# Altium PCB Control_Board_Model_C_Basic_Component_Placement.PcbDoc (part 6 of 8)
Units mil, origin at the board's own origin, x right, y up, seen from the top; angles counter-clockwise.
Board outline 3417.32 x 2110.24 mil, 6 copper layers (1-SIG-TOP, 2-GND, 3-PWR, 4-SIG-HOR, 5-SIG-VERT, 6-GND-BOT), stack 46.063 mil thick; 420 components, 340 nets, 1596 pads, 39 vias.
Unrouted connection lines stored in the file: 362.
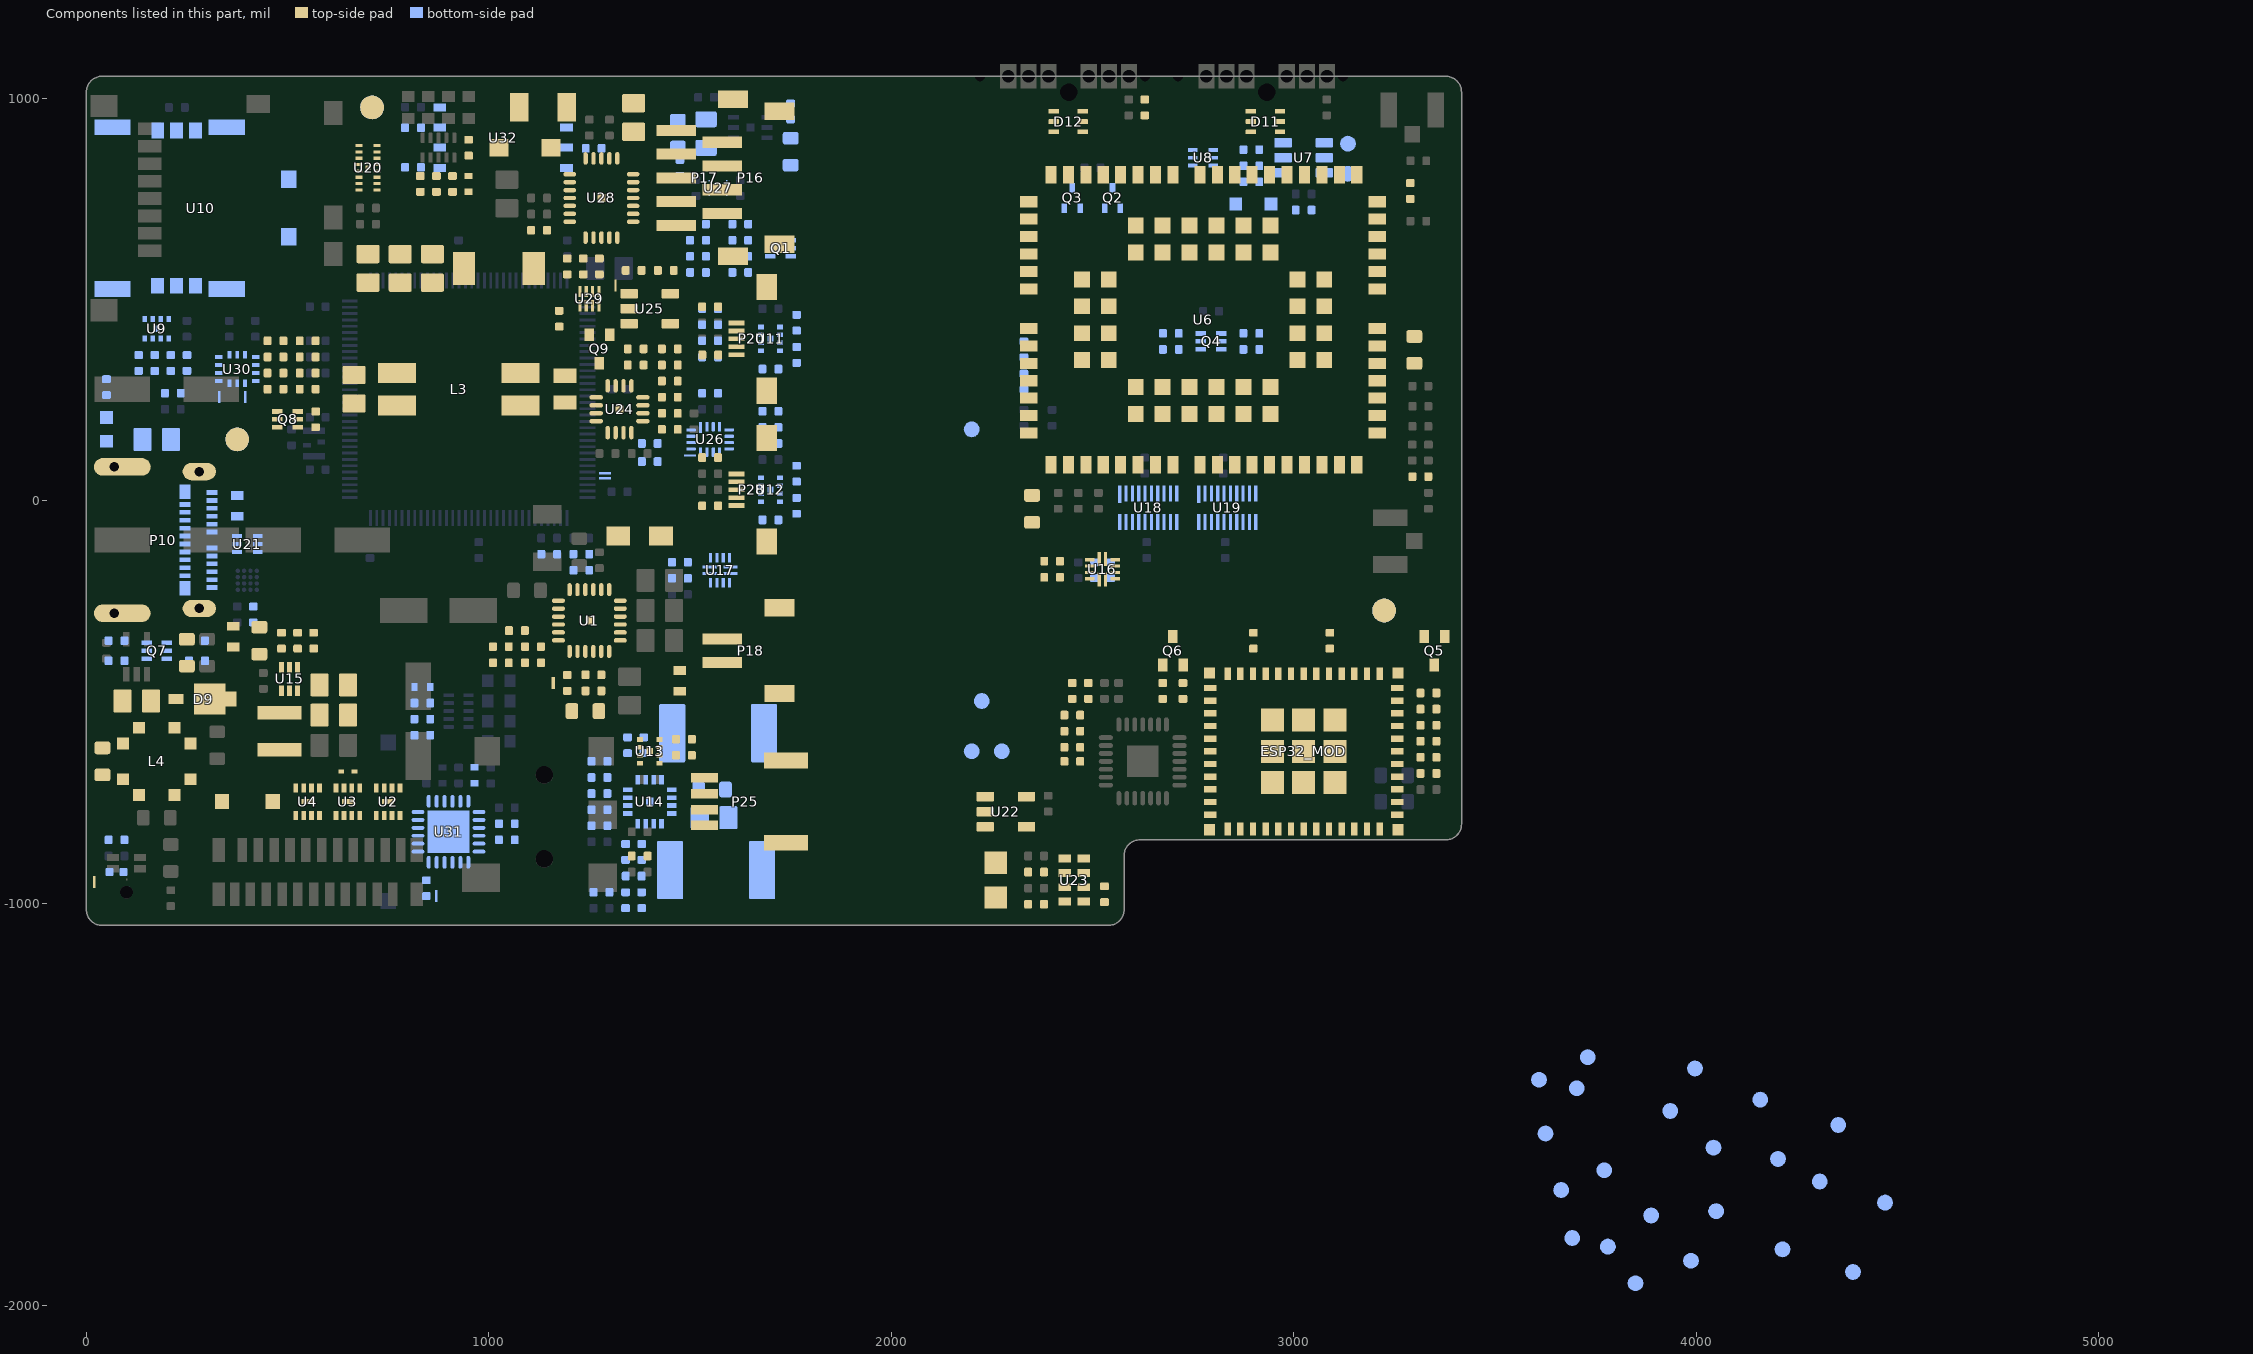
[diagram p7: the components of this part, seen from the top]

## Part data (continued)
R79: "536 kOhms ±1% 0.063W, 1/16W Chip Resistor 0402 (1005 Metric) Moisture Resistant Thick Film", Case/Package=0402, Case Code (Metric)=1005, Manufacturer=Yageo, Manufacturer Part Number=RC0402FR-07536KL, Max Operating Temperature=155°C, Max Power Dissipation=63mW, Min Operating Temperature=-55°C, Power Rating=62.5mW, Resistance=536kR, Supplier Part Number 1=YAG3181CT-ND, Temperature Coefficient=100ppm/°C, Tolerance=1%, Voltage Rating=50V, Case Code (Imperial)=0402, ComponentLink1Description=http://www.yageo.com/documents/recent/PYu-RC0402_51_RoHS_L_6.pdf?src-supplier=Avnet+Europe, ComponentLink1URL=http://www.yageo.com/documents/recent/PYu-RC0402_51_RoHS_L_6.pdf?src-supplier=Avnet+Europe, ComponentLink2Description=http://www.mouser.com/ds/2/447/PYu-RC0402_51_RoHS_L_6_r-8721.pdf?src-supplier=Mouser, ComponentLink2URL=http://www.mouser.com/ds/2/447/PYu-RC0402_51_RoHS_L_6_r-8721.pdf?src-supplier=Mouser, ComponentLink3Description=http://www.yageo.com/documents/recent/PYu-RC0402_51_RoHS_L_6_r.pdf?src-supplier=Future+Electronics, ComponentLink3URL=http://www.yageo.com/documents/recent/PYu-RC0402_51_RoHS_L_6_r.pdf?src-supplier=Future+Electronics, ComponentLink4Description=http://www.yageo.com/documents/recent/PYu-RC0402_51_RoHS_L_6.pdf?src-supplier=Avnet, ComponentLink4URL=http://www.yageo.com/documents/recent/PYu-RC0402_51_RoHS_L_6.pdf?src-supplier=Avnet, Composition="Thick Film", Contact Plating=Tin,Matte, Depth=0.5mm, Features="Moisture Resistant", Height=0.016inch, Lead Free="Lead Free", Length=1mm, Military Standard=Not, Mount="Surface Mount", Number of Terminations=2, Packaging="Tape and Reel", Pricing 1="1=0.1, 10=0.015, 100=0.0062, 1000=0.0028, 2500=0.0024, 5000=0.002 (USD)", Stock 1=16630, Supplier 1=Digi-Key, Termination=SMD/SMT, Width=0.02inch
R89 R90 R126 R134: "390 kOhms ±1% 0.063W, 1/16W Chip Resistor 0402 (1005 Metric) Moisture Resistant Thick Film", Case/Package=0402, Case Code (Metric)=1005, Manufacturer=Yageo, Manufacturer Part Number=RC0402FR-07390KL, Max Operating Temperature=155°C, Max Power Dissipation=63mW, Min Operating Temperature=-55°C, Power Rating=62.5mW, Resistance=390kR, Supplier Part Number 1=YAG3143CT-ND, Temperature Coefficient=100ppm/°C, Tolerance=1%, Voltage Rating=50V, Case Code (Imperial)=0402, ComponentLink1Description=http://www.yageo.com/documents/recent/PYu-RC0402_51_RoHS_L_6.pdf?src-supplier=Future+Electronics, ComponentLink1URL=http://www.yageo.com/documents/recent/PYu-RC0402_51_RoHS_L_6.pdf?src-supplier=Future+Electronics, ComponentLink2Description=http://www.farnell.com/datasheets/2167052.pdf?src-supplier=Element14, ComponentLink2URL=http://www.farnell.com/datasheets/2167052.pdf?src-supplier=Element14, ComponentLink3Description=http://www.mouser.com/ds/2/447/PYu-RC0402_51_RoHS_L_6_r-8721.pdf?src-supplier=Mouser, ComponentLink3URL=http://www.mouser.com/ds/2/447/PYu-RC0402_51_RoHS_L_6_r-8721.pdf?src-supplier=Mouser, Composition="Thick Film", Depth=0.5mm, Features="Moisture Resistant", Height=0.016inch, Lead Free="Lead Free", Length=1mm, Military Standard=Not, Number of Terminations=2, Packaging="Tape and Reel", Pricing 1="1=0.1, 10=0.016, 100=0.0064, 1000=0.0029, 2500=0.0025, 5000=0.0021 (USD)", REACH SVHC=Unknown, Stock 1=118017, Supplier 1=Digi-Key, Termination=SMD/SMT, Weight=2.3E-05oz, Width=0.02inch
  R89 R90: ClassName=STM32G473CETx, Mount="Surface Mount"
R92 R93 R96: "75 kOhms ±1% 0.063W, 1/16W Chip Resistor 0402 (1005 Metric) Automotive AEC-Q200 Thick Film", Case/Package=0402, Case Code (Metric)=1005, Manufacturer="Stackpole Electronics", Manufacturer Part Number=RMCF0402FT75K0, Max Operating Temperature=155°C, Max Power Dissipation=63mW, Min Operating Temperature=-55°C, Resistance=75kR, Supplier Part Number 1=RMCF0402FT75K0CT-ND, Temperature Coefficient=100ppm/°C, Tolerance=1%, Case Code (Imperial)=0402, ClassName=STM32G473CETx, ComponentLink1Description=https://www.seielect.com/catalog/SEI-Packaging.pdf?src-supplier=Digi-Key, ComponentLink1URL=https://www.seielect.com/catalog/SEI-Packaging.pdf?src-supplier=Digi-Key, ComponentLink2Description=http://www.seielect.com/Catalog/Sei-RMC.pdf?src-supplier=Future+Electronics, ComponentLink2URL=http://www.seielect.com/Catalog/Sei-RMC.pdf?src-supplier=Future+Electronics, ComponentLink3Description=https://www.seielect.com/catalog/SEI-RMCF_RMCP.pdf?src-supplier=Avnet, ComponentLink3URL=https://www.seielect.com/catalog/SEI-RMCF_RMCP.pdf?src-supplier=Avnet, ComponentLink4Description=http://components.arrow.com/part/dataview/47811039S7743759N1174?src-supplier=Arrow, ComponentLink4URL=http://components.arrow.com/part/dataview/47811039S7743759N1174?src-supplier=Arrow, ComponentLink5Description=https://www.verical.com/server-webapp/html/getDatasheet?partID=492569&src-supplier=Verical, ComponentLink5URL=https://www.verical.com/server-webapp/html/getDatasheet?partID=492569&src-supplier=Verical, Composition="Thick Film", Contact Plating=Tin,Matte, Depth=0.5mm, Features="Automotive AEC-Q200", Height=0.016inch, Lead Free="Lead Free", Length=0.039inch, Military Standard=Not, Mount="Surface Mount", Number of Terminations=2, Packaging="Tape and Reel", Power Rating=63mW, Pricing 1="1=0.1, 10=0.014, 100=0.0058, 1000=0.0026, 2500=0.0023, 5000=0.0019 (USD)", Radiation Hardening=No, Stock 1=24693, Supplier 1=Digi-Key, Width=0.02inch
R95: "27 kOhms ±1% 0.063W, 1/16W Chip Resistor 0402 (1005 Metric) Moisture Resistant Thick Film", Case/Package=0402, Case Code (Metric)=1005, Manufacturer=Yageo, Manufacturer Part Number=RC0402FR-0727KL, Max Operating Temperature=155°C, Max Power Dissipation=63mW, Min Operating Temperature=-55°C, Package Quantity=10000, Resistance=27kR, Supplier Part Number 1=311-27.0KLRCT-ND, Temperature Coefficient=100ppm/°C, Tolerance=1%, Voltage Rating=50V, Case Code (Imperial)=0402, ClassName=STM32G473CETx, ComponentLink1Description=http://www.farnell.com/datasheets/2167052.pdf?src-supplier=Element14, ComponentLink1URL=http://www.farnell.com/datasheets/2167052.pdf?src-supplier=Element14, ComponentLink2Description=http://documents.rs-components.com/techlib://itc_doclist_GB.htm?stockno=6186475&src-supplier=RSComponents, ComponentLink2URL=http://documents.rs-components.com/techlib://itc_doclist_GB.htm?stockno=6186475&src-supplier=RSComponents, ComponentLink3Description=http://www.yageo.com/documents/recent/PYu-RC_Group_51_RoHS_L_10.pdf?src-supplier=Digi-Key, ComponentLink3URL=http://www.yageo.com/documents/recent/PYu-RC_Group_51_RoHS_L_10.pdf?src-supplier=Digi-Key, ComponentLink4Description=http://www.yageo.com/documents/recent/PYu-RC0402_51_RoHS_L_6_r.pdf?src-supplier=Future+Electronics, ComponentLink4URL=http://www.yageo.com/documents/recent/PYu-RC0402_51_RoHS_L_6_r.pdf?src-supplier=Future+Electronics, Composition="Thick Film", Depth=0.5mm, Features="Moisture Resistant", Height=0.016inch, Lead Free="Lead Free", Length=1mm, Military Standard=Not, Mount="Surface Mount", Number of Terminations=2, Packaging="Tape and Reel", Power Rating=63mW, Pricing 1="1=0.1, 10=0.016, 100=0.0064, 1000=0.0029, 2500=0.0025, 5000=0.0021 (USD)", REACH SVHC=Unknown, Stock 1=1508379, Supplier 1=Digi-Key, Termination=SMD/SMT, Width=0.02inch
R98: "402 Ohms ±1% 0.063W, 1/16W Chip Resistor 0402 (1005 Metric) Moisture Resistant Thick Film", Case/Package=0402, Case Code (Metric)=1005, Manufacturer=Yageo, Manufacturer Part Number=RC0402FR-07402RL, Max Operating Temperature=155°C, Max Power Dissipation=63mW, Min Operating Temperature=-55°C, Power Rating=62.5mW, Resistance=402R, Supplier Part Number 1=YAG3152CT-ND, Temperature Coefficient=100ppm/°C, Tolerance=1%, Voltage Rating=50V, Case Code (Imperial)=0402, ComponentLink1Description=http://www.yageo.com/documents/recent/PYu-RC0402_51_RoHS_L_6.pdf?src-supplier=Avnet, ComponentLink1URL=http://www.yageo.com/documents/recent/PYu-RC0402_51_RoHS_L_6.pdf?src-supplier=Avnet, ComponentLink2Description=http://www.yageo.com/documents/recent/PYu-RC0402_51_RoHS_L_6.pdf?src-supplier=Avnet+Europe, ComponentLink2URL=http://www.yageo.com/documents/recent/PYu-RC0402_51_RoHS_L_6.pdf?src-supplier=Avnet+Europe, ComponentLink3Description=http://www.mouser.com/ds/2/447/PYu-RC0402_51_RoHS_L_6_r-8721.pdf?src-supplier=Mouser, ComponentLink3URL=http://www.mouser.com/ds/2/447/PYu-RC0402_51_RoHS_L_6_r-8721.pdf?src-supplier=Mouser, Composition="Thick Film", Contact Plating=Tin,Matte, Depth=0.5mm, Features="Moisture Resistant", Height=0.016inch, Lead Free="Lead Free", Length=0.039inch, Military Standard=Not, Mount="Surface Mount", Number of Terminations=2, Packaging="Tape and Reel", Pricing 1="1=0.1, 10=0.016, 100=0.0064, 1000=0.0029, 2500=0.0025, 5000=0.0021 (USD)", Stock 1=0, Supplier 1=Digi-Key, Termination=SMD/SMT, Width=0.02inch
R100: "54.9 kOhms ±1% 0.063W, 1/16W Chip Resistor 0402 (1005 Metric) Moisture Resistant Thick Film", Case/Package=0402, Case Code (Metric)=1005, Manufacturer=Yageo, Manufacturer Part Number=RC0402FR-0754K9L, Max Operating Temperature=155°C, Max Power Dissipation=63mW, Min Operating Temperature=-55°C, Power Rating=62.5mW, Resistance=54.9kR, Supplier Part Number 1=YAG3185CT-ND, Temperature Coefficient=100ppm/°C, Tolerance=1%, Voltage Rating=50V, Case Code (Imperial)=0402, ComponentLink1Description=http://www.yageo.com/documents/recent/PYu-RC0402_51_RoHS_L_6.pdf?src-supplier=Avnet+Europe, ComponentLink1URL=http://www.yageo.com/documents/recent/PYu-RC0402_51_RoHS_L_6.pdf?src-supplier=Avnet+Europe, ComponentLink2Description=http://www.yageo.com/documents/recent/PYu-RC0402_51_RoHS_L_6_r.pdf?src-supplier=Future+Electronics, ComponentLink2URL=http://www.yageo.com/documents/recent/PYu-RC0402_51_RoHS_L_6_r.pdf?src-supplier=Future+Electronics, ComponentLink3Description=http://www.yageo.com/documents/recent/PYu-RC0402_51_RoHS_L_6_r.pdf?src-supplier=Mouser, ComponentLink3URL=http://www.yageo.com/documents/recent/PYu-RC0402_51_RoHS_L_6_r.pdf?src-supplier=Mouser, Composition="Thick Film", Contact Plating=Tin,Matte, Depth=0.5mm, Features="Moisture Resistant", Height=0.016inch, Lead Free="Lead Free", Length=1mm, Military Standard=Not, Mount="Surface Mount", Number of Terminations=2, Packaging="Tape and Reel", Pricing 1="1=0.1, 10=0.015, 100=0.0062, 1000=0.0028, 2500=0.0024, 5000=0.002 (USD)", Stock 1=707322, Supplier 1=Digi-Key, Termination=SMD/SMT, Voltage Rating (DC)=50V, Width=0.02inch
R101: "1.2 kOhms ±1% 0.063W, 1/16W Chip Resistor 0402 (1005 Metric) Moisture Resistant Thick Film", Case/Package=0402, Case Code (Metric)=1005, Manufacturer=Yageo, Manufacturer Part Number=RC0402FR-071K2L, Max Operating Temperature=155°C, Max Power Dissipation=63mW, Min Operating Temperature=-55°C, Package Quantity=1, Resistance=1.2kR, Supplier Part Number 1=311-1.20KLRCT-ND, Temperature Coefficient=100ppm/°C, Tolerance=1%, Voltage Rating=50V, Case Code (Imperial)=0402, ComponentLink1Description=http://www.farnell.com/datasheets/2167052.pdf?src-supplier=Element14, ComponentLink1URL=http://www.farnell.com/datasheets/2167052.pdf?src-supplier=Element14, ComponentLink2Description=https://www.verical.com/server-webapp/html/getDatasheet?partID=323716&src-supplier=Verical, ComponentLink2URL=https://www.verical.com/server-webapp/html/getDatasheet?partID=323716&src-supplier=Verical, ComponentLink3Description=http://documents.rs-components.com/techlib://itc_doclist_GB.htm?stockno=6186138&src-supplier=RSComponents, ComponentLink3URL=http://documents.rs-components.com/techlib://itc_doclist_GB.htm?stockno=6186138&src-supplier=RSComponents, ComponentLink4Description=http://www.yageo.com/documents/recent/PYu-RC_Group_51_RoHS_L_10.pdf?src-supplier=Digi-Key, ComponentLink4URL=http://www.yageo.com/documents/recent/PYu-RC_Group_51_RoHS_L_10.pdf?src-supplier=Digi-Key, ComponentLink5Description=http://www.yageo.com/documents/recent/PYu-RC_Group_51_RoHS_L_9.pdf?src-supplier=Digi-Key, ComponentLink5URL=http://www.yageo.com/documents/recent/PYu-RC_Group_51_RoHS_L_9.pdf?src-supplier=Digi-Key, ComponentLink6Description=http://www.yageo.com/documents/recent/PYu-RC0402_51_RoHS_L_6_r.pdf?src-supplier=Future+Electronics, ComponentLink6URL=http://www.yageo.com/documents/recent/PYu-RC0402_51_RoHS_L_6_r.pdf?src-supplier=Future+Electronics, Composition="Thick Film", Depth=0.5mm, Features="Moisture Resistant", Height=0.016inch, Lead Free="Lead Free", Length=1mm, Military Standard=Not, Mount="Surface Mount", Number of Terminations=2, Packaging="Tape and Reel", Power Rating=63mW, Pricing 1="1=0.1, 10=0.015, 100=0.0062, 1000=0.0028, 2500=0.0024, 5000=0.002 (USD)", REACH SVHC=Unknown, Stock 1=894472, Supplier 1=Digi-Key, Termination=SMD/SMT, Width=0.02inch
R105: "44.2 kOhms ±1% 0.063W, 1/16W Chip Resistor 0402 (1005 Metric) Moisture Resistant Thick Film", Case/Package=0402, Case Code (Metric)=1005, Manufacturer=Yageo, Manufacturer Part Number=RC0402FR-0744K2L, Max Operating Temperature=155°C, Max Power Dissipation=63mW, Min Operating Temperature=-55°C, Power Rating=62.5mW, Resistance=44.2kR, Supplier Part Number 1=YAG3163CT-ND, Temperature Coefficient=100ppm/°C, Tolerance=1%, Voltage Rating=50V, Case Code (Imperial)=0402, ComponentLink1Description=http://www.yageo.com/documents/recent/PYu-RC0402_51_RoHS_L_6.pdf?src-supplier=Avnet+Europe, ComponentLink1URL=http://www.yageo.com/documents/recent/PYu-RC0402_51_RoHS_L_6.pdf?src-supplier=Avnet+Europe, ComponentLink2Description=http://www.yageo.com/documents/recent/PYu-RC0402_51_RoHS_L_6.pdf?src-supplier=Avnet, ComponentLink2URL=http://www.yageo.com/documents/recent/PYu-RC0402_51_RoHS_L_6.pdf?src-supplier=Avnet, ComponentLink3Description=http://www.mouser.com/ds/2/447/PYu-RC0402_51_RoHS_L_6_r-8721.pdf?src-supplier=Mouser, ComponentLink3URL=http://www.mouser.com/ds/2/447/PYu-RC0402_51_RoHS_L_6_r-8721.pdf?src-supplier=Mouser, ComponentLink4Description=http://www.yageo.com/documents/recent/PYu-RC0402_51_RoHS_L_6_r.pdf?src-supplier=Future+Electronics, ComponentLink4URL=http://www.yageo.com/documents/recent/PYu-RC0402_51_RoHS_L_6_r.pdf?src-supplier=Future+Electronics, Composition="Thick Film", Contact Plating=Tin,Matte, Depth=0.5mm, Features="Moisture Resistant", Height=0.016inch, Lead Free="Lead Free", Length=0.039inch, Military Standard=Not, Mount="Surface Mount", Number of Terminations=2, Packaging="Tape and Reel", Pricing 1="1=0.1, 10=0.015, 100=0.0062, 1000=0.0028, 2500=0.0024, 5000=0.002 (USD)", Stock 1=66217, Supplier 1=Digi-Key, Termination=SMD/SMT, Voltage Rating (DC)=50V, Width=0.02inch, Working Voltage=50V
R106: "11 kOhms ±1% 0.063W, 1/16W Chip Resistor 0402 (1005 Metric) Moisture Resistant Thick Film", Case/Package=0402, Case Code (Metric)=1005, Manufacturer=Yageo, Manufacturer Part Number=RC0402FR-0711KL, Max Operating Temperature=155°C, Max Power Dissipation=63mW, Min Operating Temperature=-55°C, Package Quantity=1, Resistance=11kR, Supplier Part Number 1=311-11.0KLRCT-ND, Temperature Coefficient=100ppm/°C, Tolerance=1%, Voltage Rating=50V, Case Code (Imperial)=0402, ComponentLink1Description=http://www.yageo.com/documents/recent/PYu-RC_Group_51_RoHS_L_10.pdf?src-supplier=Digi-Key, ComponentLink1URL=http://www.yageo.com/documents/recent/PYu-RC_Group_51_RoHS_L_10.pdf?src-supplier=Digi-Key, ComponentLink2Description=http://www.yageo.com/documents/recent/PYu-RC_Group_51_RoHS_L_9.pdf?src-supplier=Digi-Key, ComponentLink2URL=http://www.yageo.com/documents/recent/PYu-RC_Group_51_RoHS_L_9.pdf?src-supplier=Digi-Key, ComponentLink3Description=http://www.mouser.com/ds/2/447/PYu-RC0402_51_RoHS_L_6_r-8721.pdf?src-supplier=Mouser, ComponentLink3URL=http://www.mouser.com/ds/2/447/PYu-RC0402_51_RoHS_L_6_r-8721.pdf?src-supplier=Mouser, ComponentLink4Description=http://www.farnell.com/datasheets/1018594.pdf?src-supplier=Farnell, ComponentLink4URL=http://www.farnell.com/datasheets/1018594.pdf?src-supplier=Farnell, Composition="Thick Film", Depth=0.5mm, Features="Moisture Resistant", Height=0.016inch, Lead Free="Lead Free", Length=0.039inch, Military Standard=Not, Mount="Surface Mount", Number of Pins=2, Number of Terminations=2, Packaging="Tape and Reel", Power Rating=63mW, Pricing 1="1=0.1, 10=0.015, 100=0.0062, 1000=0.0028, 2500=0.0024, 5000=0.002 (USD)", REACH SVHC="No SVHC", Stock 1=632376, Supplier 1=Digi-Key, Termination=SMD/SMT, Voltage Rating (DC)=50V, Width=0.02inch
R107 R108: library part "RES SMD 4.75K OHM 1% 1/16W 0402", "4.75 kOhms ±1% 0.063W, 1/16W Chip Resistor 0402 (1005 Metric) Moisture Resistant Thick Film", Case/Package=0402, Case Code (Metric)=1005, Manufacturer=Yageo, Manufacturer Part Number=RC0402FR-074K75P, Max Operating Temperature=155°C, Max Power Dissipation=63mW, Min Operating Temperature=-55°C, Resistance=4.75kR, Supplier Part Number 1=YAG1271CT-ND, Temperature Coefficient=150ppm/°C, Tolerance=1%, Case Code (Imperial)=0402, ComponentLink1Description=http://www.yageo.com/NewPortal/yageodocoutput?fileName=/pdf/R-Chip/PYu-RC_51_RoHS_P_0.pdf&src-supplier=Digi-Key, ComponentLink1URL=http://www.yageo.com/NewPortal/yageodocoutput?fileName=/pdf/R-Chip/PYu-RC_51_RoHS_P_0.pdf&src-supplier=Digi-Key, ComponentLink2Description=http://www.yageo.com.tw/exep/pages/download/literatures/PYu-R_INT-thick_7.pdf?src-supplier=Digi-Key, ComponentLink2URL=http://www.yageo.com.tw/exep/pages/download/literatures/PYu-R_INT-thick_7.pdf?src-supplier=Digi-Key, Composition="Thick Film", Features="Moisture Resistant", Height=0.016inch, Length=0.039inch, Number of Terminations=2, Packaging="Tape and Reel", Pricing 1="1=0.1, 10=0.035, 100=0.014, 1000=0.0063, 2500=0.0055, 5000=0.0045 (USD)", Stock 1=23485, Supplier 1=Digi-Key, Width=0.02inch
R110: "39 Ohms ±5% 0.25W, 1/4W Chip Resistor 1206 (3216 Metric) Moisture Resistant Thick Film", Case/Package=1206, Case Code (Metric)=3216, Manufacturer=Yageo, Manufacturer Part Number=RC1206JR-0739RL, Max Operating Temperature=155°C, Min Operating Temperature=-55°C, Power Rating=250mW, Resistance=39R, Supplier Part Number 1=311-39ERCT-ND, Temperature Coefficient=100ppm/°C, Tolerance=5%, Voltage Rating=200V, Case Code (Imperial)=1206, ComponentLink1Description=http://www.yageo.com/documents/recent/PYu-RC1206_51_RoHS_L-4.pdf?src-supplier=Future+Electronics, ComponentLink1URL=http://www.yageo.com/documents/recent/PYu-RC1206_51_RoHS_L-4.pdf?src-supplier=Future+Electronics, ComponentLink2Description=http://www.farnell.com/datasheets/444357.pdf?src-supplier=Element14, ComponentLink2URL=http://www.farnell.com/datasheets/444357.pdf?src-supplier=Element14, ComponentLink3Description=https://produktinfo.conrad.com/datenblaetter/400000-424999/402370-da-01-en-SMD_Widerstand_Chip1206_39_Ohm.pdf?src-supplier=Conrad, ComponentLink3URL=https://produktinfo.conrad.com/datenblaetter/400000-424999/402370-da-01-en-SMD_Widerstand_Chip1206_39_Ohm.pdf?src-supplier=Conrad, Composition="Thick Film", Contact Plating=Tin,Matte, Depth=1.6mm, Height=0.55mm, Lead Free="Lead Free", Length=3.2mm, Military Standard=Not, Mount="Surface Mount", Number of Pins=2, Packaging="Tape and Reel", Pricing 1="1=0.1, 10=0.061, 100=0.0249, 1000=0.0112, 2500=0.0097 (USD)", Radiation Hardening=No, REACH SVHC=Unknown, Stock 1=98107, Supplier 1=Digi-Key, Termination=SMD/SMT, Voltage Rating (DC)=200V, Weight=0.000571oz, Width=1.6mm
R113 R117 R122 R132: "100 Ohms ±1% 0.063W, 1/16W Chip Resistor 0402 (1005 Metric) Moisture Resistant Thick Film", Case/Package=0402, Case Code (Metric)=1005, Manufacturer=Yageo, Manufacturer Part Number=RC0402FR-07100RL, Max Operating Temperature=155°C, Min Operating Temperature=-55°C, Power Rating=62.5mW, Resistance=100R, Supplier Part Number 1=311-100LRDKR-ND, Temperature Coefficient=100ppm/°C, Tolerance=1%, Voltage Rating=50V, Case Code (Imperial)=0402, ComponentLink1Description=http://www.farnell.com/datasheets/2167052.pdf?src-supplier=Element14, ComponentLink1URL=http://www.farnell.com/datasheets/2167052.pdf?src-supplier=Element14, ComponentLink2Description=http://www.yageo.com/documents/recent/PYu-RC_Group_51_RoHS_L_9.pdf?src-supplier=Mouser, ComponentLink2URL=http://www.yageo.com/documents/recent/PYu-RC_Group_51_RoHS_L_9.pdf?src-supplier=Mouser, ComponentLink3Description=http://www.yageo.com/documents/recent/PYu-RC0402_51_RoHS_L_6_r.pdf?src-supplier=Future+Electronics, ComponentLink3URL=http://www.yageo.com/documents/recent/PYu-RC0402_51_RoHS_L_6_r.pdf?src-supplier=Future+Electronics, ComponentLink4Description=https://www.verical.com/server-webapp/html/getDatasheet?partID=329466&src-supplier=Verical, ComponentLink4URL=https://www.verical.com/server-webapp/html/getDatasheet?partID=329466&src-supplier=Verical, ComponentLink5Description=http://www.farnell.com/datasheets/1018594.pdf?src-supplier=Element14, ComponentLink5URL=http://www.farnell.com/datasheets/1018594.pdf?src-supplier=Element14, ComponentLink6Description=http://documents.rs-components.com/techlib://itc_doclist_GB.htm?stockno=6185810&src-supplier=RSComponents, ComponentLink6URL=http://documents.rs-components.com/techlib://itc_doclist_GB.htm?stockno=6185810&src-supplier=RSComponents, Composition="Thick Film", Depth=0.5mm, Height=0.32mm, Lead Free="Lead Free", Length=1mm, Military Standard=Not, Number of Pins=2, Packaging="Tape and Reel", Pricing 1="1=0.1, 10=0.016, 100=0.0064, 1000=0.0029, 2500=0.0025, 5000=0.0021 (USD)", REACH SVHC="No SVHC", Stock 1=16989760, Supplier 1=Digi-Key, Termination=SMD/SMT, Voltage Rating (DC)=50V, Width=0.5mm
  R117 R122: Mount="Surface Mount"
R114: "63.4 kOhms ±1% 0.063W, 1/16W Chip Resistor 0402 (1005 Metric) Moisture Resistant Thick Film", Case/Package=0402, Case Code (Metric)=1005, Manufacturer=Yageo, Manufacturer Part Number=RC0402FR-0763K4L, Max Operating Temperature=155°C, Max Power Dissipation=63mW, Min Operating Temperature=-55°C, Power Rating=62.5mW, Resistance=63.4kR, Supplier Part Number 1=YAG3204CT-ND, Temperature Coefficient=100ppm/°C, Tolerance=1%, Voltage Rating=50V, Case Code (Imperial)=0402, ComponentLink1Description=http://www.yageo.com/documents/recent/PYu-RC0402_51_RoHS_L_6.pdf?src-supplier=Avnet+Europe, ComponentLink1URL=http://www.yageo.com/documents/recent/PYu-RC0402_51_RoHS_L_6.pdf?src-supplier=Avnet+Europe, ComponentLink2Description=http://www.yageo.com/documents/recent/PYu-RC0402_51_RoHS_L_6_r.pdf?src-supplier=Future+Electronics, ComponentLink2URL=http://www.yageo.com/documents/recent/PYu-RC0402_51_RoHS_L_6_r.pdf?src-supplier=Future+Electronics, ComponentLink3Description=http://www.yageo.com/documents/recent/PYu-RC0402_51_RoHS_L_6.pdf?src-supplier=Avnet, ComponentLink3URL=http://www.yageo.com/documents/recent/PYu-RC0402_51_RoHS_L_6.pdf?src-supplier=Avnet, Composition="Thick Film", Contact Plating=Tin,Matte, Depth=0.5mm, Features="Moisture Resistant", Height=0.016inch, Lead Free="Lead Free", Length=1mm, Military Standard=Not, Number of Terminations=2, Packaging="Tape and Reel", Pricing 1="1=0.1, 10=0.015, 100=0.0062, 1000=0.0028, 2500=0.0024, 5000=0.002 (USD)", Stock 1=453897, Supplier 1=Digi-Key, Termination=SMD/SMT, Width=0.02inch
R124: "100 Ohms ±1% 0.5W, 1/2W Chip Resistor 0805 (2012 Metric) Automotive AEC-Q200, Pulse Withstanding Thick Film", Case/Package=0805, Case Code (Metric)=2012, Manufacturer=Panasonic, Manufacturer Part Number=ERJ-P6WF1000V, Max Operating Temperature=155°C, Max Power Dissipation=500mW, Min Operating Temperature=-55°C, Resistance=100R, Supplier Part Number 1=P16873CT-ND, Temperature Coefficient=200ppm/°C, Tolerance=1%, Voltage Rating=150V, Case Code (Imperial)=0805, ComponentLink1Description=http://industrial.panasonic.com/www-data/pdf/AOA0000/AOA0000CE4.pdf?src-supplier=Avnet, ComponentLink1URL=http://industrial.panasonic.com/www-data/pdf/AOA0000/AOA0000CE4.pdf?src-supplier=Avnet, ComponentLink2Description=http://www.farnell.com/datasheets/1790600.pdf?src-supplier=Element14, ComponentLink2URL=http://www.farnell.com/datasheets/1790600.pdf?src-supplier=Element14, ComponentLink3Description=https://www.distrelec.biz/Web/Downloads/_t/ds/ERJP-series_eng_tds.pdf?mime=application%2Fpdf&src-supplier=Distrelec, ComponentLink3URL=https://www.distrelec.biz/Web/Downloads/_t/ds/ERJP-series_eng_tds.pdf?mime=application%2Fpdf&src-supplier=Distrelec, Composition="Thick Film", Contact Plating=Tin, Depth=1.25mm, Features="Automotive AEC-Q200", Height=0.03inch, Length=0.079inch, Mount="Surface Mount", Number of Terminations=2, Packaging="Cut Tape", Power Rating=500mW, Pricing 1="1=0.54, 10=0.412, 100=0.1731, 1000=0.0955, 2500=0.0896 (USD)", REACH SVHC="No SVHC", Stock 1=36332, Supplier 1=Digi-Key, Termination=Flat, Voltage Rating (DC)=150V, Width=0.049inch
R125 R133: "910 kOhms ±1% 0.063W, 1/16W Chip Resistor 0402 (1005 Metric) Moisture Resistant Thick Film", Case/Package=0402, Case Code (Metric)=1005, Manufacturer=Yageo, Manufacturer Part Number=RC0402FR-07910KL, Max Operating Temperature=155°C, Max Power Dissipation=63mW, Min Operating Temperature=-55°C, Power Rating=62.5mW, Resistance=910kR, Supplier Part Number 1=YAG3257CT-ND, Temperature Coefficient=100ppm/°C, Tolerance=1%, Voltage Rating=50V, Case Code (Imperial)=0402, ComponentLink1Description=http://www.yageo.com/documents/recent/PYu-RC0402_51_RoHS_L_6.pdf?src-supplier=Avnet+Europe, ComponentLink1URL=http://www.yageo.com/documents/recent/PYu-RC0402_51_RoHS_L_6.pdf?src-supplier=Avnet+Europe, ComponentLink2Description=https://www.verical.com/server-webapp/html/getDatasheet?partID=741075&src-supplier=Verical, ComponentLink2URL=https://www.verical.com/server-webapp/html/getDatasheet?partID=741075&src-supplier=Verical, ComponentLink3Description=http://www.yageo.com/documents/recent/PYu-RC0402_51_RoHS_L_6.pdf?src-supplier=Avnet, ComponentLink3URL=http://www.yageo.com/documents/recent/PYu-RC0402_51_RoHS_L_6.pdf?src-supplier=Avnet, Composition="Thick Film", Contact Plating=Tin,Matte, Depth=0.5mm, Features="Moisture Resistant", Height=0.016inch, Lead Free="Lead Free", Length=1mm, Military Standard=Not, Number of Terminations=2, Packaging="Tape and Reel", Pricing 1="1=0.1, 10=0.015, 100=0.0062, 1000=0.0028, 2500=0.0024, 5000=0.002 (USD)", REACH SVHC=Unknown, Stock 1=96210, Supplier 1=Digi-Key, Termination=SMD/SMT, Voltage Rating (DC)=50V, Width=0.5mm
R127 R135: "88.7 kOhms ±1% 0.063W, 1/16W Chip Resistor 0402 (1005 Metric) Moisture Resistant Thick Film", Case/Package=0402, Case Code (Metric)=1005, Manufacturer=Yageo, Manufacturer Part Number=RC0402FR-0788K7L, Max Operating Temperature=155°C, Min Operating Temperature=-55°C, Power Rating=62.5mW, Resistance=88.7kR, Supplier Part Number 1=311-88.7KLRCT-ND, Temperature Coefficient=100ppm/°C, Tolerance=1%, Voltage Rating=50V, Case Code (Imperial)=0402, ComponentLink1Description=http://www.yageo.com/documents/recent/PYu-RC0402_51_RoHS_L_6.pdf?src-supplier=Avnet+Europe, ComponentLink1URL=http://www.yageo.com/documents/recent/PYu-RC0402_51_RoHS_L_6.pdf?src-supplier=Avnet+Europe, ComponentLink2Description=http://www.yageo.com/documents/recent/PYu-RC0402_51_RoHS_L_6_r.pdf?src-supplier=Future+Electronics, ComponentLink2URL=http://www.yageo.com/documents/recent/PYu-RC0402_51_RoHS_L_6_r.pdf?src-supplier=Future+Electronics, ComponentLink3Description=http://www.yageo.com/documents/recent/PYu-RC0402_51_RoHS_L_6.pdf?src-supplier=Avnet, ComponentLink3URL=http://www.yageo.com/documents/recent/PYu-RC0402_51_RoHS_L_6.pdf?src-supplier=Avnet, Composition="Thick Film", Contact Plating=Tin,Matte, Depth=0.5mm, Height=0.35mm, Lead Free="Lead Free", Length=1mm, Military Standard=Not, Packaging="Tape and Reel", Pricing 1="1=0.1, 10=0.016, 100=0.0064, 1000=0.0029, 2500=0.0025, 5000=0.0021 (USD)", Stock 1=136150, Supplier 1=Digi-Key, Termination=SMD/SMT, Voltage Rating (DC)=50V, Width=0.5mm
R128: "23.7 kOhms ±1% 0.063W, 1/16W Chip Resistor 0402 (1005 Metric) Moisture Resistant Thick Film", Case/Package=0402, Case Code (Metric)=1005, Manufacturer=Yageo, Manufacturer Part Number=RC0402FR-0723K7L, Max Operating Temperature=155°C, Max Power Dissipation=63mW, Min Operating Temperature=-55°C, Power Rating=62.5mW, Resistance=23.7kR, Supplier Part Number 1=YAG3067CT-ND, Temperature Coefficient=100ppm/°C, Tolerance=1%, Voltage Rating=50V, Case Code (Imperial)=0402, ComponentLink1Description=http://www.yageo.com/documents/recent/PYu-RC0402_51_RoHS_L_6.pdf?src-supplier=Avnet+Europe, ComponentLink1URL=http://www.yageo.com/documents/recent/PYu-RC0402_51_RoHS_L_6.pdf?src-supplier=Avnet+Europe, ComponentLink2Description=https://www.verical.com/server-webapp/html/getDatasheet?partID=325115&src-supplier=Verical, ComponentLink2URL=https://www.verical.com/server-webapp/html/getDatasheet?partID=325115&src-supplier=Verical, ComponentLink3Description=http://www.mouser.com/ds/2/447/PYu-RC0402_51_RoHS_L_6_r-8721.pdf?src-supplier=Mouser, ComponentLink3URL=http://www.mouser.com/ds/2/447/PYu-RC0402_51_RoHS_L_6_r-8721.pdf?src-supplier=Mouser, ComponentLink4Description=http://www.yageo.com/documents/recent/PYu-RC0402_51_RoHS_L_6.pdf?src-supplier=Avnet, ComponentLink4URL=http://www.yageo.com/documents/recent/PYu-RC0402_51_RoHS_L_6.pdf?src-supplier=Avnet, Composition="Thick Film", Contact Plating=Tin,Matte, Depth=0.5mm, Features="Moisture Resistant", Height=0.016inch, Lead Free="Lead Free", Length=1mm, Military Standard=Not, Mount="Surface Mount", Number of Terminations=2, Packaging="Tape and Reel", Pricing 1="1=0.1, 10=0.016, 100=0.0064, 1000=0.0029, 2500=0.0025, 5000=0.0021 (USD)", Radiation Hardening=No, Stock 1=58499, Supplier 1=Digi-Key, Termination=SMD/SMT, Voltage Rating (DC)=50V, Weight=2.3E-05oz, Width=0.02inch
R131: "2.26 Ohms ±1% 0.1W, 1/10W Chip Resistor 0603 (1608 Metric) Automotive AEC-Q200 Thick Film", Case/Package=0603, Case Code (Metric)=1608, Manufacturer="Vishay Dale", Manufacturer Part Number=CRCW06032R26FKEA, Max Operating Temperature=155°C, Max Power Dissipation=100mW, Min Operating Temperature=-55°C, Package Quantity=5000, Resistance=2.26R, Supplier Part Number 1=541-2.26HHCT-ND, Temperature Coefficient=100ppm/°C, Tolerance=1%, Voltage Rating=75V, Case Code (Imperial)=0603, ComponentLink1Description=http://www.vishay.com/docs/20035/dcrcwe3.pdf?src-supplier=Avnet, ComponentLink1URL=http://www.vishay.com/docs/20035/dcrcwe3.pdf?src-supplier=Avnet, Composition="Thick Film", Contact Plating=Tin, Depth=0.85mm, Features="Automotive AEC-Q200", Height=0.02inch, Lead Free="Lead Free", Length=1.55mm, Military Standard=Not, Mount="Surface Mount", Number of Terminations=2, Packaging="Tape and Reel", Power Rating=100mW, Pricing 1="1=0.1, 10=0.04, 100=0.0164, 1000=0.0074, 2500=0.0064 (USD)", Radiation Hardening=No, Stock 1=18141, Supplier 1=Digi-Key, Termination=SMD/SMT, Weight=7.1E-05oz, Width=0.85mm
TP1 TP2 TP3 TP4 TP5 TP6 TP7 TP8 TP9 TP10 TP11 TP12 TP13 TP14 TP15 TP16 TP17 TP18 TP19 TP20 TP21 TP22 TP23 TP24 TP25 TP26 TP27 TP28: "Test Point. There is nothing to buy or mount.", Manufacturer=N/A, ClassName=TestPoint, CompType=TestPoint, MountType=N/A, PackageReference=TetsPoint, PartNumber=N/A
U1: library part "IC BQ25611DRTWR BATTERY CHARGER WQFN-24", "Charger IC Lithium Ion/Polymer 24-WQFN (4x4)", Manufacturer="Texas Instruments", Supplier Part Number 1=595-BQ25611DRTWT, Brand="Texas Instruments", Category="Battery Management", ComponentLink1Description="Data sheet", ComponentLink1URL=https://www.ti.com/lit/gpn/bq25611d, Manufacturer Part Number=BQ25611DRTWT, Minimum Order Quantity=1, Moisture Sensitive=Yes, Mount="Surface Mount", Packaging="Cut Tape", Pricing 1="1=4.41, 10=3.96, 100=3.34, 250=2.91, 500=2.76, 1000=2.33, 2500=2.21, 5000=2.13 (USD)", Product Status="New Product", Product Type="Battery Management", Reeling=True, RoHS="RoHS Compliant", RoHS - Mouser=Y, Standard Pack Qty=250, Stock 1=208, Subcategory="PMIC - Power Management ICs", Supplier 1=Mouser
U2 U3 U4: library part "FILTER RC(PI) 200 OHM/15PF SMD", "EMI filter w/ ESD prot. NUF4401MN 12mm r", Attenuation Value=35dB, Capacitance=15pF, Case/Package=DFN, DC Resistance (DCR)=230R, Frequency=2.4GHz, Manufacturer="ON Semiconductor", Max DC Current=100nA, Max Operating Temperature=85°C, Min Operating Temperature=-40°C, Package Quantity=1, Resistance=200R, Supplier Part Number 1=488-NUF4401MNT1GCT-ND, Test Frequency=125MHz, Circuit Type=Filter, ComponentLink1Description=http://www.onsemi.com/pub/Collateral/NUF4401MN-D.PDF?src-supplier=Digi-Key, ComponentLink1URL=http://www.onsemi.com/pub/Collateral/NUF4401MN-D.PDF?src-supplier=Digi-Key, ComponentLink2Description=http://www.onsemi.com/pub/Collateral/NUF4401MN-D.PDF?src-supplier=Avnet, ComponentLink2URL=http://www.onsemi.com/pub/Collateral/NUF4401MN-D.PDF?src-supplier=Avnet, ComponentLink3Description=http://www.onsemi.com/pub_link/Collateral/NUF4401MN-D.PDF?src-supplier=Avnet+Europe, ComponentLink3URL=http://www.onsemi.com/pub_link/Collateral/NUF4401MN-D.PDF?src-supplier=Avnet+Europe, ComponentLink4Description=http://www.mouser.com/ds/2/308/NUF4401MN-D-100381.pdf?src-supplier=Mouser, ComponentLink4URL=http://www.mouser.com/ds/2/308/NUF4401MN-D-100381.pdf?src-supplier=Mouser, Contact Plating=Tin,Matte, Depth=2mm, ESD Protection=Yes, Halogen Free="Halogen Free", Height=1mm, Lead Free="Lead Free", Length=2mm, Manufacturer Part Number=NUF4401MNT1G, Mount="Surface Mount", Number of Channels=4, Number of Elements=8, Number of Lines=4, Number of Pins=8, Packaging="Tape and Reel", Pricing 1="1=0.49, 10=0.45, 25=0.4296, 50=0.4158, 100=0.4019, 250=0.3812, 500=0.3188, 1000=0.2474 (USD)", Radiation Hardening=No, Shielding=Unshielded, Stock 1=2896, Supplier 1=Digi-Key, Termination=Flat, Width=0.079inch
U6: library part "MOD BG95 RX TXRX CELLULAR LTE/NAV SMD", "LTE Cat M1, LTE Cat NB2 and EGPRS Transceiver Module Antenna Not Included Surface Mount", Manufacturer=QUECTEL, Geometry.Height=2.2mm, Manufacturer Part Number=BG95-M1, Mount="Surface Mount", Part Description="IC MODULE BG95 102-LGA 19.9x23.6mm H2.2mm RO", PCB DECAL=BG95
U7: library part "TVS DIODE 5.25V 17V SOT23-6", "17V Clamp 5A (8/20µs) Ipp Tvs Diode Surface Mount SOT-23-6", Breakdown Voltage=6V, Capacitance=3.5pF, Case/Package=SOT-23, Clamping Voltage=17V, Leakage Current=150nA, Manufacturer=STMicroelectronics, Max Operating Temperature=125°C, Min Operating Temperature=-40°C, Operating Supply Voltage=1.1V, Package Quantity=3000, Peak Pulse Current=5A, Power Line Protection=Yes, Reverse Standoff Voltage=5.25V, Supplier Part Number 1=497-5235-1-ND, Test Current=1mA, Working Voltage=5V, ComponentLink1Description=http://www.farnell.com/datasheets/1738051.pdf?src-supplier=Element14, ComponentLink1URL=http://www.farnell.com/datasheets/1738051.pdf?src-supplier=Element14, ComponentLink2Description=http://www.st.com/content/ccc/resource/technical/document/datasheet/06/1d/48/9c/6c/20/4a/b2/CD00050750.pdf/files/CD00050750.pdf/jcr:content/translations/en.CD00050750.pdf?src-supplier=Mouser, ComponentLink2URL=http://www.st.com/content/ccc/resource/technical/document/datasheet/06/1d/48/9c/6c/20/4a/b2/CD00050750.pdf/files/CD00050750.pdf/jcr:content/translations/en.CD00050750.pdf?src-supplier=Mouser, ComponentLink3Description=http://www.st.com/web/en/resource/technical/document/datasheet/CD00050750.pdf?src-supplier=Future+Electronics, ComponentLink3URL=http://www.st.com/web/en/resource/technical/document/datasheet/CD00050750.pdf?src-supplier=Future+Electronics, ComponentLink4Description=http://www.st.com/content/ccc/resource/technical/document/datasheet/06/1d/48/9c/6c/20/4a/b2/CD00050750.pdf/files/CD00050750.pdf/jcr:content/translations/en.CD00050750.pdf?src-supplier=Verical, ComponentLink4URL=http://www.st.com/content/ccc/resource/technical/document/datasheet/06/1d/48/9c/6c/20/4a/b2/CD00050750.pdf/files/CD00050750.pdf/jcr:content/translations/en.CD00050750.pdf?src-supplier=Verical, ComponentLink5Description=http://datasheet.iiic.cc/stmicroelectronics/USBLC6-2SC6.pdf?src-supplier=IIIC, ComponentLink5URL=http://datasheet.iiic.cc/stmicroelectronics/USBLC6-2SC6.pdf?src-supplier=IIIC, ComponentLink6Description=http://www.produktinfo.conrad.com/datenblaetter/1100000-1199999/001184109-da-01-en-IC_ESD_PROTECTI_USBLC6_2SC6_SOT_23_6_STM.pdf?src-supplier=Conrad, ComponentLink6URL=http://www.produktinfo.conrad.com/datenblaetter/1100000-1199999/001184109-da-01-en-IC_ESD_PROTECTI_USBLC6_2SC6_SOT_23_6_STM.pdf?src-supplier=Conrad, Contact Plating=Tin,Matte, Data Rate=480Mbps, Depth=1.75mm, Direction=Unidirectional,Bidirectional, Element Configuration=Dual, ESD Protection=Yes, Height=1.3mm, Lead Free="Lead Free", Length=3.05mm, Manufacturer Part Number=USBLC6-2SC6, Max Breakdown Voltage=6V, Max Reverse Leakage Current=150nA, Min Breakdown Voltage=6V, Mount="Surface Mount", Number of Bidirectional Channels=2, Number of Channels=2, Number of Elements=1, Number of Pins=6, Packaging="Tape and Reel", Polarity=Unidirectional,Bidirectional, Pricing 1="1=0.47, 10=0.399, 25=0.3728, 100=0.2769, 250=0.263, 500=0.2162, 1000=0.1757 (USD)", Radiation Hardening=No, REACH SVHC="No SVHC", Reverse Breakdown Voltage=6V, Stock 1=49245, Supplier 1=Digi-Key, Termination=SMD/SMT, Width=1.75mm
U8 U21: library part "CMC 200MA 2LN SMD ESD", "2 Line Common Mode Choke Surface Mount  200mA DCR 2.5Ohm", Case/Package=QFN, Current=200mA, DC Resistance (DCR)=2.5R, Manufacturer=STMicroelectronics, Max Operating Temperature=85°C, Min Operating Temperature=-40°C, Package Quantity=1, Supplier Part Number 1=497-10773-1-ND, ComponentLink1Description=http://www.st.com/web/en/resource/technical/document/datasheet/CD00282307.pdf?src-supplier=Future+Electronics, ComponentLink1URL=http://www.st.com/web/en/resource/technical/document/datasheet/CD00282307.pdf?src-supplier=Future+Electronics, ComponentLink2Description=http://www.st.com/content/ccc/resource/technical/document/datasheet/3a/28/cf/d0/31/63/48/8c/CD00282307.pdf/files/CD00282307.pdf/jcr:content/translations/en.CD00282307.pdf?src-supplier=Digi-Key, ComponentLink2URL=http://www.st.com/content/ccc/resource/technical/document/datasheet/3a/28/cf/d0/31/63/48/8c/CD00282307.pdf/files/CD00282307.pdf/jcr:content/translations/en.CD00282307.pdf?src-supplier=Digi-Key, ComponentLink3Description=http://www.mouser.com/ds/2/389/ecmf02-2amx6-954491.pdf?src-supplier=Mouser, ComponentLink3URL=http://www.mouser.com/ds/2/389/ecmf02-2amx6-954491.pdf?src-supplier=Mouser, ComponentLink4Description=https://www.verical.com/server-webapp/html/getDatasheet?partID=259862&src-supplier=Verical, ComponentLink4URL=https://www.verical.com/server-webapp/html/getDatasheet?partID=259862&src-supplier=Verical, Current Rating=200mA, Depth=1.55mm, Height=0.022inch, Lead Free="Lead Free", Length=1.75mm, Manufacturer Part Number=ECMF02-2AMX6, Max Current Rating=200mA, Mount="Surface Mount", Number of Lines=2, Number of Pins=6, Packaging="Tape and Reel", Pricing 1="1=0.48, 10=0.418, 25=0.3888, 50=0.3288, 100=0.2989, 250=0.281, 500=0.2511, 1000=0.2033 (USD)", Radiation Hardening=No, REACH SVHC="No SVHC", Stock 1=23653, Supplier 1=Digi-Key, Termination=Flat, Width=0.059inch
U9 U11 U12 U13: library part "FILTER RC(PI) ESD SMD  8-UFDFN EP", "RC (Pi) EMI Filter 2nd Order Low Pass 3 Channel R = 47Ohms, 100Ohms, C = 20pF  8-UFDFN Exposed Pad", Capacitance=20pF, Case/Package=SMD/SMT, Clamping Voltage=10V, Frequency=308MHz, Manufacturer="Texas Instruments", Max Operating Temperature=85°C, Min Operating Temperature=-40°C, Operating Supply Voltage=5.5V, Package Quantity=1, Supplier Part Number 1=296-28299-1-ND, ComponentLink1Description=http://www.ti.com/lit/ds/symlink/tpd3f303.pdf?src-supplier=Digi-Key, ComponentLink1URL=http://www.ti.com/lit/ds/symlink/tpd3f303.pdf?src-supplier=Digi-Key, ComponentLink2Description=http://focus.ti.com/lit/ds/symlink/tpd3f303.pdf?src-supplier=Avnet+Europe, ComponentLink2URL=http://focus.ti.com/lit/ds/symlink/tpd3f303.pdf?src-supplier=Avnet+Europe, ComponentLink3Description=https://www.verical.com/server-webapp/html/getDatasheet?partID=302817&src-supplier=Verical, ComponentLink3URL=https://www.verical.com/server-webapp/html/getDatasheet?partID=302817&src-supplier=Verical, ComponentLink4Description=http://www.farnell.com/datasheets/1558442.pdf?src-supplier=Element14, ComponentLink4URL=http://www.farnell.com/datasheets/1558442.pdf?src-supplier=Element14, Contact Plating=Gold, Depth=1.7mm, ESD Protection=Yes, Height=0.026inch, Lead Free="Lead Free", Length=2.2mm, Manufacturer Part Number=TPD3F303DPVR, Mount="Surface Mount", Number of Channels=3, Number of Pins=8, Packaging="Tape and Reel", Pricing 1="1=0.85, 10=0.812, 25=0.7856, 50=0.6414, 100=0.576, 250=0.5236, 500=0.4974, 1000=0.4451 (USD)", Radiation Hardening=No, REACH SVHC="No SVHC", Stock 1=4896, Supplier 1=Digi-Key, Termination=Flat, Width=0.063inch
U10: library part "NANOSIM SOCKET 1.11H P/PULL TYPE", "6 Position Card Connector NANO SIM Surface Mount, Right Angle Gold", Manufacturer=Molex, Supplier Part Number 1=WM23749CT-ND, ComponentLink1Description=https://www.molex.com/pdm_docs/sd/1042240820_sd.pdf?src-supplier=Digi-Key, ComponentLink1URL=https://www.molex.com/pdm_docs/sd/1042240820_sd.pdf?src-supplier=Digi-Key, ComponentLink2Description=http://www.molex.com/pdm_docs/sd/1042240820_sd.pdf?src-supplier=Avnet, ComponentLink2URL=http://www.molex.com/pdm_docs/sd/1042240820_sd.pdf?src-supplier=Avnet, Connector Type=Connector, Contact Plating=Gold, Manufacturer Part Number=1042240820, Mount="Surface Mount", Number of Positions=6, Number of Rows=2, Orientation="Right Angle", Packaging="Tape and Reel", Pitch=2.54mm, Pricing 1="1=1.31, 10=1.152, 25=1.0844, 50=1.039, 100=0.9939, 250=0.9036, 500=0.8132, 1000=0.7228 (USD)", Stock 1=10989, Supplier 1=Digi-Key
U14: library part "IC STSPIN220 MOTOR DRVR BIPOLAR 0-5V 16FPN", "Bipolar Motor Driver Power MOSFET Step/Direction 16-VFQFPN (3x3)", Manufacturer=STMicroelectronics, Max Operating Temperature=150°C, Min Operating Temperature=-40°C, Output Current=1.3A, Supplier Part Number 1=497-16602-1-ND, ComponentLink1Description=http://www.st.com/content/ccc/resource/technical/document/datasheet/group3/42/7e/5c/90/70/ef/47/95/DM00291865/files/DM00291865.pdf/jcr:content/translations/en.DM00291865.pdf?src-supplier=Digi-Key, ComponentLink1URL=http://www.st.com/content/ccc/resource/technical/document/datasheet/group3/42/7e/5c/90/70/ef/47/95/DM00291865/files/DM00291865.pdf/jcr:content/translations/en.DM00291865.pdf?src-supplier=Digi-Key, ComponentLink2Description=http://www.farnell.com/datasheets/2815804.pdf?src-supplier=Newark, ComponentLink2URL=http://www.farnell.com/datasheets/2815804.pdf?src-supplier=Newark, ComponentLink3Description=http://www.farnell.com/datasheets/2815804.pdf?src-supplier=Farnell, ComponentLink3URL=http://www.farnell.com/datasheets/2815804.pdf?src-supplier=Farnell, Logic Function=AND, Manufacturer Part Number=STSPIN220, Mount="Surface Mount", Packaging="Cut Tape", Pricing 1="1=1.62, 10=1.458, 25=1.3752, 100=1.1, 250=0.9625, 500=0.935, 1000=0.7425 (USD)", Stock 1=3586, Supplier 1=Digi-Key
U15: library part "IC TPS61023DRLT REG BOOST ADJ 3A SOT563", "Boost Switching Regulator IC Positive Adjustable 2.2V 1 Output 3A SOT-563, SOT-666", Input Voltage="0.5 V to 5.5 V", Input Voltage MAX="5.5 V", Input Voltage MIN="0.5 V", Manufacturer="Texas Instruments", Maximum Operating Temperature="+ 125 C", Minimum Operating Temperature="- 40 C", Output Current="3.7 A", Output Voltage="2.2 V to 5.5 V", Package / Case=SOT-5X3-6, Quiescent Current="0.9 uA", Supplier Part Number 1=595-TPS61023DRLT, Switching Frequency="1 MHz", Brand="Texas Instruments", Category="Switching Voltage Regulators", Development Kit=TPS61023EVM-052, Height="0.55 mm", Length="1.6 mm", Manufacturer Part Number=TPS61023DRLT, Minimum Order Quantity=1, Mount="Surface Mount", Mounting Style=SMD/SMT, Number of Outputs="1 Output", Packaging="Cut Tape", Pricing 1="1=1.07, 10=0.902, 100=0.693, 250=0.612, 500=0.580, 1000=0.451, 2500=0.429, 5000=0.413, 10000=0.400 (USD)", Product Status="New Product", Product Type="Switching Voltage Regulators", Reeling=True, RoHS="RoHS Compliant", RoHS - Mouser=Y, Series=TPS61023, Shutdown=Shutdown, Standard Pack Qty=250, Stock 1=196, Subcategory="PMIC - Power Management ICs", Supplier 1=Mouser, Supplier 2=Digi-Key, Supplier Part Number 2=296-TPS61023DRLTCT-ND, Supply Voltage - Min="0.5 V", Topology=Boost, Width="1.2 mm"
U16 U17: library part "IC TS3USB3031 USB SWITCH DUAL 1X2 12WQFN", "USB Switch IC 1 Channel 12-WQFN (1.8x1.8)", Manufacturer="Texas Instruments", Maximum Operating Temperature="+ 85 C", Minimum Operating Temperature="- 40 C", On Resistance - Max="7 Ohms", Operating Supply Current="40 uA", Operating Supply Voltage="2.5 V", Package / Case=WQFN-12, Supplier Part Number 1=595-TS3USB3031RMGR, Supply Voltage - Max="4.3 V", Switch Continuous Current="60 mA", Bandwidth="6.5 GHz", Brand="Texas Instruments", Category="USB Switch ICs", ComponentLink1Description="Data sheet", ComponentLink1URL=https://www.ti.com/lit/gpn/ts3usb3031, Configuration="1 x DP3T", Development Kit=TS3USB3031EVM, Manufacturer Part Number=TS3USB3031RMGR, Minimum Order Quantity=1, Mount="Surface Mount", Mounting Style=SMD/SMT, Number of Switches="2 Switch", Off Time - Max="0.1 ns", On Time - Max="100 us", Packaging="Cut Tape", Pricing 1="1=1.16, 10=0.980, 100=0.753, 250=0.666, 500=0.630, 1000=0.490, 3000=0.466, 6000=0.448, 9000=0.434 (USD)", Product="USB 2.0, MHL, MyDP Switches", Product Type="USB Switch ICs", Reeling=True, RoHS="RoHS Compliant", RoHS - Mouser=Y, Series=TS3USB3031, Standard Pack Qty=3000, Stock 1=14547, Subcategory="Switch ICs", Supplier 1=Mouser, Supplier 2=Digi-Key, Supplier Part Number 2=296-41018-1-ND, Supply Voltage - Min="2.5 V"
U18 U19: library part "IC TXB0108 TRNSLTR BIDIRECTIONAL 20USON", "Voltage Level Translator Bidirectional 1 Circuit 8 Channel 100Mbps 20-USON (4x2)", High Level Output Current=-20uA, Low Level Output Current=20uA, Manufacturer="Texas Instruments", Max Operating Temperature=85°C, Max Supply Voltage=5.5V, Min Operating Temperature=-40°C, Min Supply Voltage=1.2V, Package Quantity=1, Quiescent Current=3.5uA, Supplier Part Number 1=296-27217-1-ND, ComponentLink1Description=http://www.ti.com/general/docs/lit/getliterature.tsp?genericPartNumber=TXB0108&amp;&amp;fileType=pdf&src-supplier=Element14, ComponentLink1URL=http://www.ti.com/general/docs/lit/getliterature.tsp?genericPartNumber=TXB0108&amp;&amp;fileType=pdf&src-supplier=Element14, ComponentLink2Description=http://www.ti.com/general/docs/suppproductinfo.tsp?distId=10&gotoUrl=http%3A%2F%2Fwww.ti.com%2Flit%2Fgpn%2Ftxb0108&src-supplier=Digi-Key, ComponentLink2URL=http://www.ti.com/general/docs/suppproductinfo.tsp?distId=10&gotoUrl=http%3A%2F%2Fwww.ti.com%2Flit%2Fgpn%2Ftxb0108&src-supplier=Digi-Key, ComponentLink3Description=http://www.ti.com/lit/ds/symlink/txb0108.pdf?src-supplier=Avnet+Europe, ComponentLink3URL=http://www.ti.com/lit/ds/symlink/txb0108.pdf?src-supplier=Avnet+Europe, ComponentLink4Description=http://www.ti.com/general/docs/lit/getliterature.tsp?genericPartNumber=TXB0108&&fileType=pdf&src-supplier=Avnet, ComponentLink4URL=http://www.ti.com/general/docs/lit/getliterature.tsp?genericPartNumber=TXB0108&&fileType=pdf&src-supplier=Avnet, Data Rate=100Mbps, Lead Free="Lead Free", Logic Function=Translator, Manufacturer Part Number=TXB0108DQSR, Mount="Surface Mount", Number of Bits=8, Number of Channels=8, Number of Inputs=8, Number of Pins=20, Packaging="Tape and Reel", Pricing 1="1=1.29, 10=1.151, 25=1.092, 100=0.897, 250=0.8385, 500=0.741, 1000=0.585 (USD)", Propagation Delay=4ns, Radiation Hardening=No, REACH SVHC="No SVHC", Stock 1=18752, Supplier 1=Digi-Key, Turn-On Delay Time=35.6ns
U20: library part "FILTER RC(PI) 45 OHM/20PF SMD", "RC (Pi) EMI Filter 2nd Order Low Pass 6 Channel R = 45Ohms, C = 20pF (Total)  16-UFDFN Exposed Pad", Breakdown Voltage=8V, Capacitance=20pF, Case/Package=QFN, Manufacturer=STMicroelectronics, Max Operating Temperature=85°C, Min Operating Temperature=-30°C, Package Quantity=1, Supplier Part Number 1=497-8751-1-ND, ComponentLink1Description=http://www.st.com/content/ccc/resource/technical/document/datasheet/a7/86/d3/98/2c/7f/4b/d2/CD00217829.pdf/files/CD00217829.pdf/jcr:content/translations/en.CD00217829.pdf?src-supplier=Digi-Key, ComponentLink1URL=http://www.st.com/content/ccc/resource/technical/document/datasheet/a7/86/d3/98/2c/7f/4b/d2/CD00217829.pdf/files/CD00217829.pdf/jcr:content/translations/en.CD00217829.pdf?src-supplier=Digi-Key, ComponentLink2Description=https://www.verical.com/server-webapp/html/getDatasheet?partID=558558&src-supplier=Verical, ComponentLink2URL=https://www.verical.com/server-webapp/html/getDatasheet?partID=558558&src-supplier=Verical, ComponentLink3Description=http://www.st.com/web/en/resource/technical/document/datasheet/CD00217829.pdf?src-supplier=Mouser, ComponentLink3URL=http://www.st.com/web/en/resource/technical/document/datasheet/CD00217829.pdf?src-supplier=Mouser, Contact Plating=Gold, Depth=1.25mm, ESD Protection=Yes, Height=0.022inch, Lead Free="Lead Free", Length=3.55mm, Manufacturer Part Number=EMIF06-MSD02N16, Max Breakdown Voltage=8V, Mount="Surface Mount", Number of Channels=6, Number of Pins=16, Packaging="Tape and Reel", Pricing 1="1=0.95, 10=0.904, 25=0.8752, 50=0.7148, 100=0.6418, 250=0.5834, 500=0.5543, 1000=0.4959 (USD)", Radiation Hardening=No, REACH SVHC="No SVHC", Stock 1=3881, Supplier 1=Digi-Key, Termination=Flat, Width=0.047inch